# Altium PCB PCB_AltiumDesigner (3).PcbDoc
Units mm, origin at the board's own origin, x right, y up, seen from the top; angles counter-clockwise.
Board outline 152.4 x 101.6 mm, 2 copper layers (Top Layer, Bottom Layer); 15 components, 14 nets, 62 pads, 0 vias.
Unrouted connection lines stored in the file: 2.
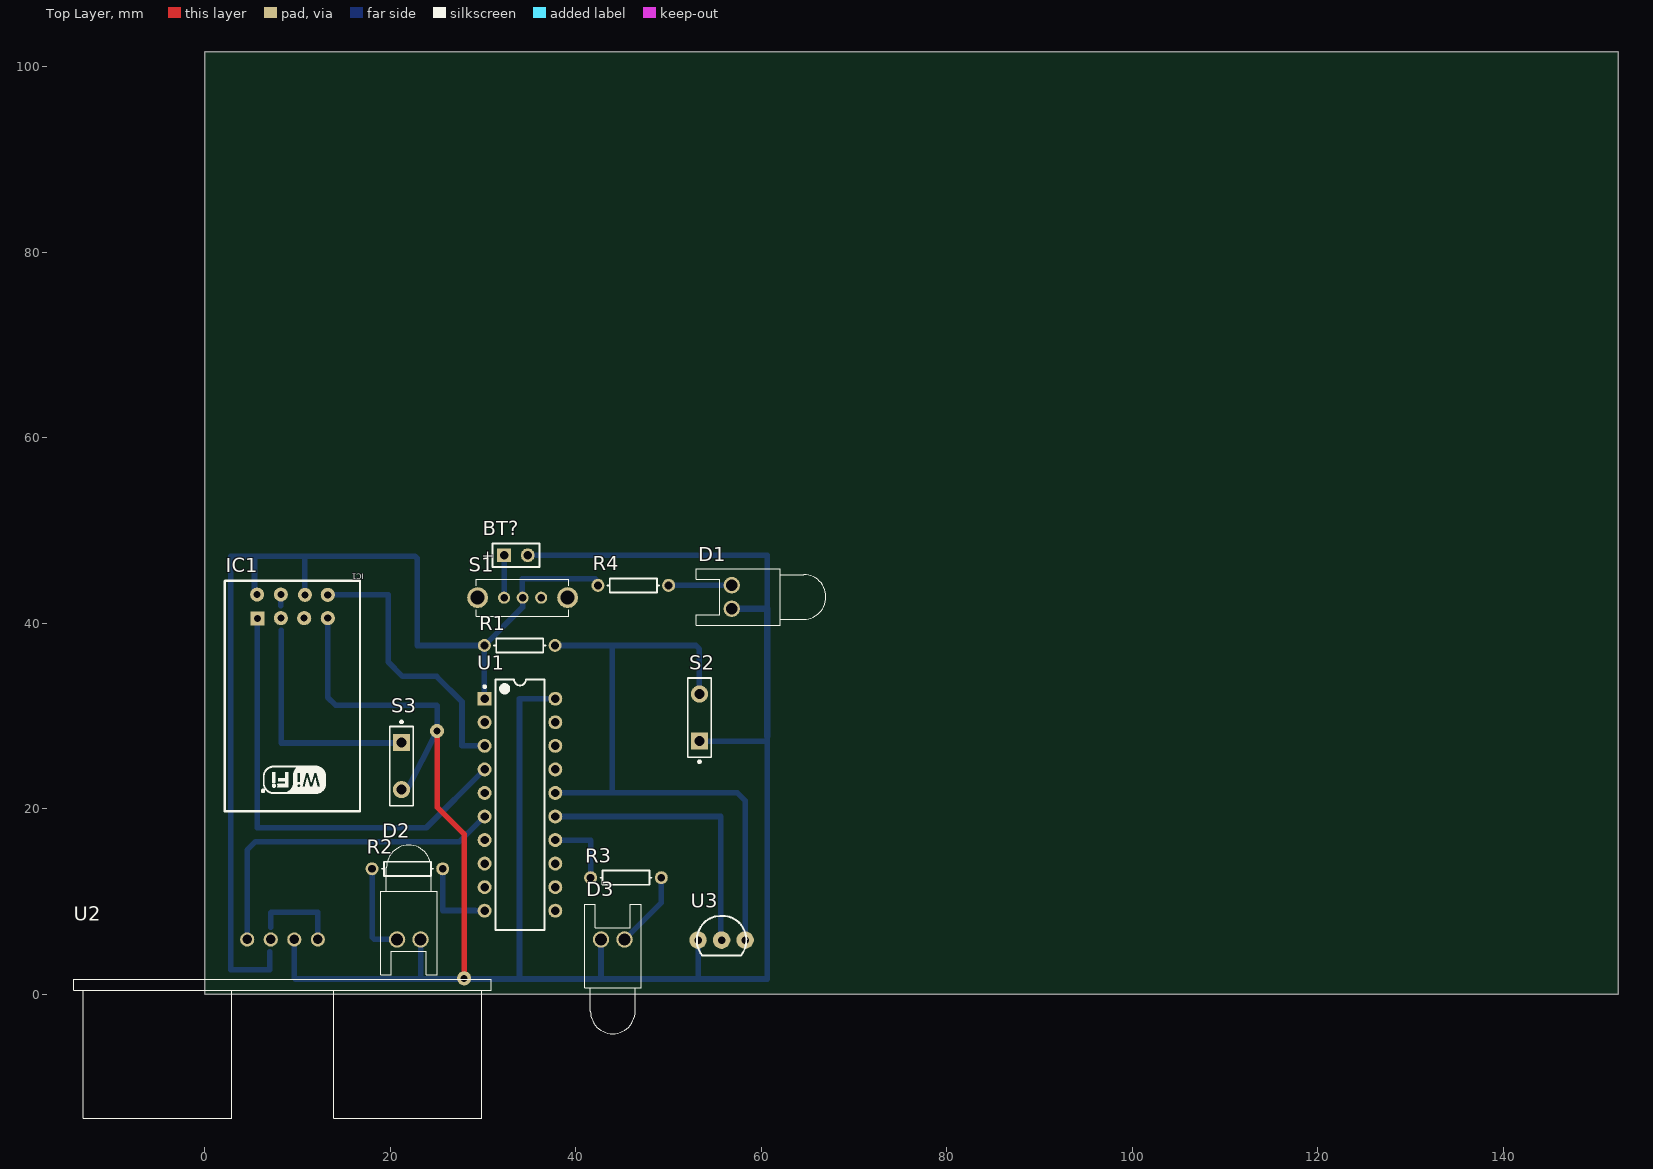
[diagram p0: Top Layer view]
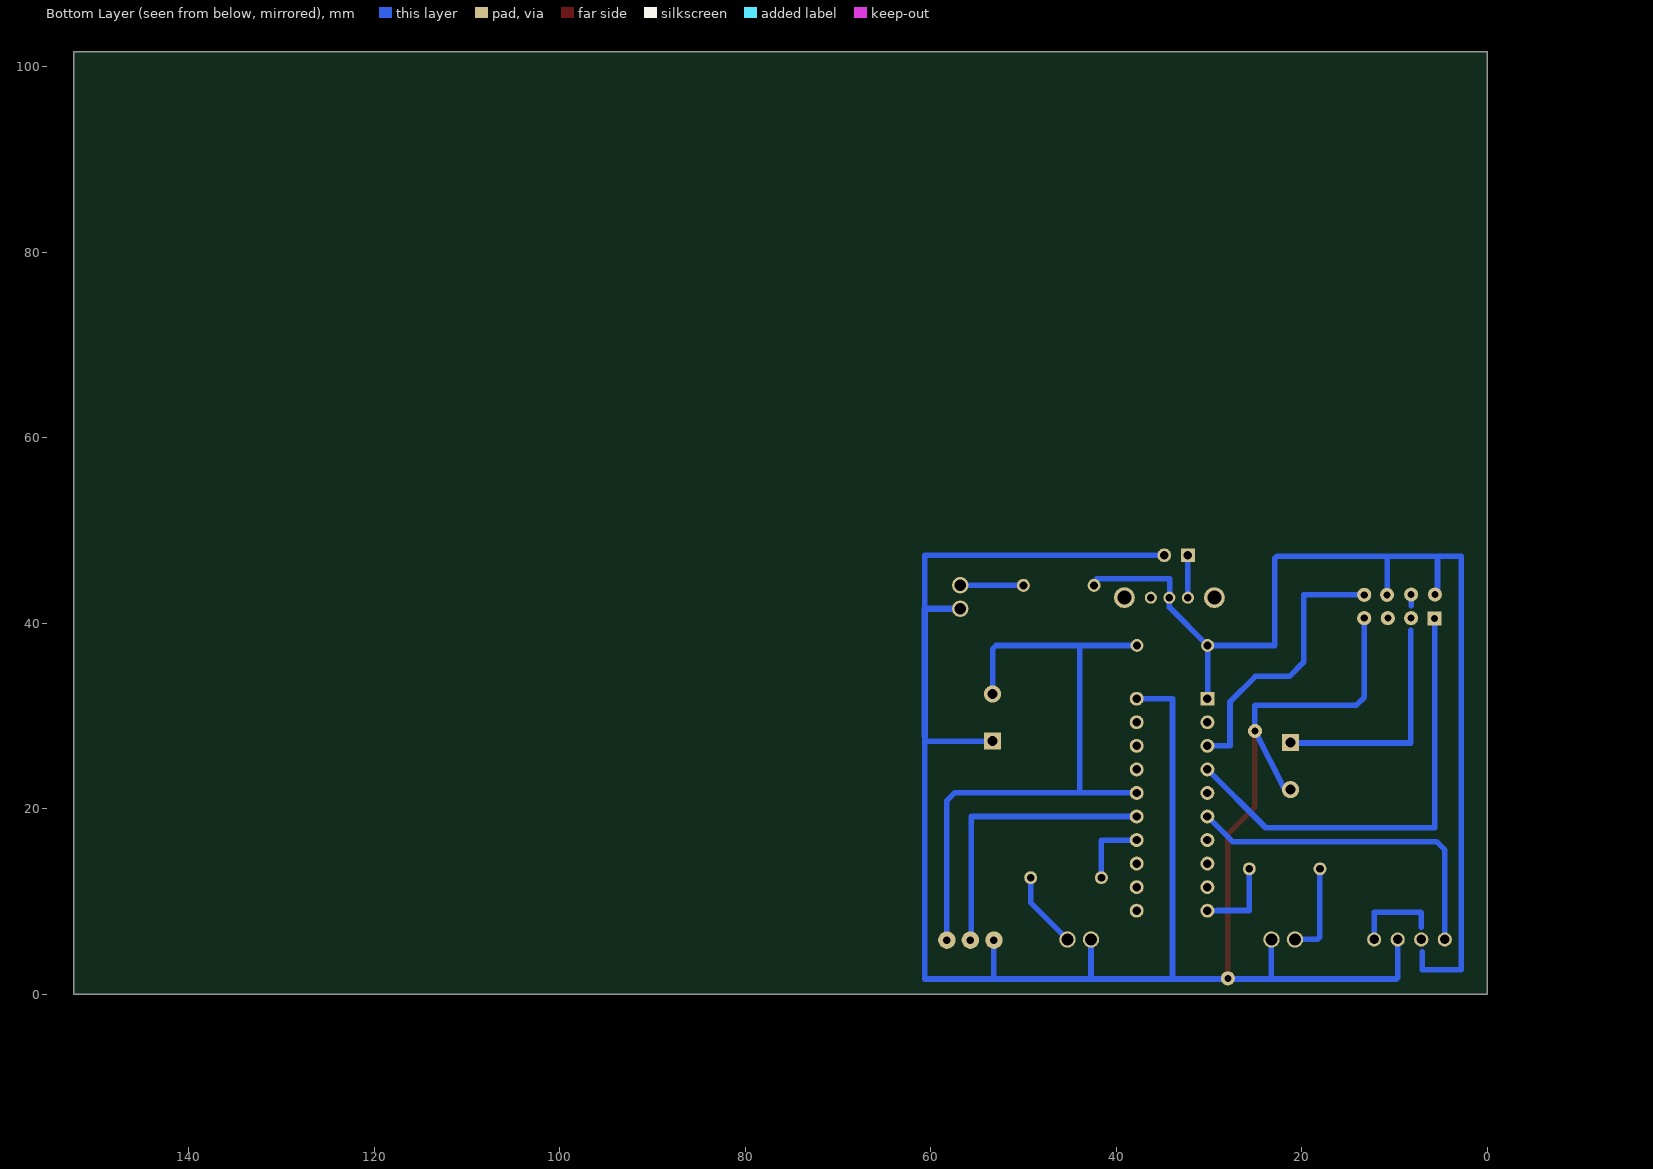
[diagram p1: Bottom Layer view, seen from below]

## Layer stack, top to bottom
Top Solder: solder mask 0.0102, Solder Resist, Dk 3.5
Top Layer: signal copper 0.0356
Dielectric 1: dielectric 0.32, FR-4, Dk 4.8
Bottom Layer: signal copper 0.0356
Bottom Solder: solder mask 0.0102, Solder Resist, Dk 3.5

## Board outline
0,0 152.4,0 152.4,101.6 0,101.6

## Design rules (kind name [scope] priority, off if disabled: settings)
AssemblyTestPointUsage [All] p0: scope1count=1 scope1_0_kind=Board scope1_0_value=Board scope2count=1 scope2_0_kind=Board scope2_0_value=Board commentlength=0
AssemblyTestpoint [All] p0: scope1count=1 scope1_0_kind=Board scope1_0_value=Board scope2count=1 scope2_0_kind=Board scope2_0_value=Board commentlength=0
Clearance [All] p0: scope1count=1 scope1_0_kind=Board scope1_0_value=Board scope2count=1 scope2_0_kind=Board scope2_0_value=Board commentlength=0 gap=0.254
Clearance [All] p1: gap=0.254 ignorepadtopadclearanceinfootprint=FALSE except(0: Arc-Hole Track-Hole SMDPad-Hole THPad-Hole Via-Hole Fill-Hole Poly-Hole Region-Hole Text-Hole)
ComponentClearance [All] p0: scope1count=1 scope1_0_kind=Board scope1_0_value=Board scope2count=1 scope2_0_kind=Board scope2_0_value=Board commentlength=0 gap=0.254 collisioncheckmode=3
DiffPairsRouting [All] p0: scope1count=1 scope1_0_kind=Board scope1_0_value=Board scope2count=1 scope2_0_kind=Board scope2_0_value=Board commentlength=0
FabricationTestPointUsage [All] p0: scope1count=1 scope1_0_kind=Board scope1_0_value=Board scope2count=1 scope2_0_kind=Board scope2_0_value=Board commentlength=0 valid=0 allowmultiple=FALSE
FabricationTestpoint [All] p0: scope1count=1 scope1_0_kind=Board scope1_0_value=Board scope2count=1 scope2_0_kind=Board scope2_0_value=Board commentlength=0 side=3 testpointundercomponent=TRUE minsize=1.016 maxsize=2.54 preferedsize=1.524 minholesize=0 maxholesize=1.016 preferedholesize=0.813 testpointgrid=0.025
FanoutControl Fanout_Default [All] p0: scope1count=1 scope1_0_kind=Board scope1_0_value=Board scope2count=1 scope2_0_kind=Board scope2_0_value=Board commentlength=30 // Fanout_Default (Default Rule)
FanoutControl Fanout_Small [All] p0 off: scope1count=1 scope1_0_kind=Board scope1_0_value=Board scope2count=1 scope2_0_kind=Board scope2_0_value=Board commentlength=84 // Protel DXP Scope 1 Expression Was: (CompPinCount < 5)   Fanout_Small (Default Rule)
FanoutControl Fanout_SOIC [All] p0 off: scope1count=1 scope1_0_kind=Board scope1_0_value=Board scope2count=1 scope2_0_kind=Board scope2_0_value=Board commentlength=71 // Protel DXP Scope 1 Expression Was: IsSOIC   Fanout_SOIC (Default Rule)
FanoutControl Fanout_LCC [All] p0 off: scope1count=1 scope1_0_kind=Board scope1_0_value=Board scope2count=1 scope2_0_kind=Board scope2_0_value=Board commentlength=69 // Protel DXP Scope 1 Expression Was: IsLCC   Fanout_LCC (Default Rule)
FanoutControl Fanout_BGA [All] p0 off: scope1count=1 scope1_0_kind=Board scope1_0_value=Board scope2count=1 scope2_0_kind=Board scope2_0_value=Board commentlength=69 // Protel DXP Scope 1 Expression Was: IsBGA   Fanout_BGA (Default Rule)
Height [All] p0: scope1count=1 scope1_0_kind=Board scope1_0_value=Board scope2count=1 scope2_0_kind=Board scope2_0_value=Board commentlength=0
HoleSize [All] p0: scope1count=1 scope1_0_kind=Board scope1_0_value=Board scope2count=1 scope2_0_kind=Board scope2_0_value=Board commentlength=0 absolutevalues=TRUE maxlimit=2.54 minlimit=0.025 maxpercent=80.000 minpercent=20.000
HoleToHoleClearance [All] p0: scope1count=1 scope1_0_kind=Board scope1_0_value=Board scope2count=1 scope2_0_kind=Board scope2_0_value=Board commentlength=0
LayerPairs [All] p0: scope1count=1 scope1_0_kind=Board scope1_0_value=Board scope2count=1 scope2_0_kind=Board scope2_0_value=Board commentlength=0 enforce=TRUE
MinimumSolderMaskSliver [All] p0: scope1count=1 scope1_0_kind=Board scope1_0_value=Board scope2count=1 scope2_0_kind=Board scope2_0_value=Board commentlength=0
NetAntennae [All] p0: scope1count=1 scope1_0_kind=Board scope1_0_value=Board scope2count=1 scope2_0_kind=Board scope2_0_value=Board commentlength=0
PasteMaskExpansion [All] p0: scope1count=1 scope1_0_kind=Board scope1_0_value=Board scope2count=1 scope2_0_kind=Board scope2_0_value=Board commentlength=0 expansion=0
PlaneClearance [All] p0: scope1count=1 scope1_0_kind=Board scope1_0_value=Board scope2count=1 scope2_0_kind=Board scope2_0_value=Board commentlength=0 clearance=0.508
PlaneConnect [All] p0: scope1count=1 scope1_0_kind=Board scope1_0_value=Board scope2count=1 scope2_0_kind=Board scope2_0_value=Board commentlength=0 planeconnectstyle=Relief reliefexpansion=0.508 reliefentries=4 reliefconductorwidth=0.254 reliefairgap=0.254
PolygonConnect [All] p0: scope1count=1 scope1_0_kind=Board scope1_0_value=Board scope2count=1 scope2_0_kind=Board scope2_0_value=Board commentlength=0 connectstyle=Relief reliefconductorwidth=0.254 reliefentries=4 polygonreliefangle="90 Angle"
PolygonConnect [All] p1: connectstyle=Relief reliefconductorwidth=0.254 reliefentries=4 polygonreliefangle="90 Angle" airgapwidth=0.254
RoomDefinition Sheet1 [All] p0: scope1count=1 scope1_0_kind=ComponentClass scope1_0_value=Sheet1 scope2count=1 scope2_0_kind=Board scope2_0_value=Board commentlength=0 region_x1=10000000 region_y1=10000000 region_x2=36000000 region_y2=29400000 confinementstyle=ConfineIn
RoomDefinition Sheet1 [InComponentClass('Sheet1')] p1: confinementstyle=ConfineIn formatcopy=TRUE lockcomponents=FALSE outline 0,0 66.04,0 66.04,49.276 0,49.276
RoutingCorners [All] p0: scope1count=1 scope1_0_kind=Board scope1_0_value=Board scope2count=1 scope2_0_kind=Board scope2_0_value=Board commentlength=0 cornerstyle=45-Degree minsetback=2.54 maxsetback=2.54
RoutingLayers [All] p0: scope1count=1 scope1_0_kind=Board scope1_0_value=Board scope2count=1 scope2_0_kind=Board scope2_0_value=Board commentlength=0 top layer=Automatic bottom layer=Automatic
RoutingPriority [All] p0: scope1count=1 scope1_0_kind=Board scope1_0_value=Board scope2count=1 scope2_0_kind=Board scope2_0_value=Board commentlength=0
RoutingTopology [All] p0: scope1count=1 scope1_0_kind=Board scope1_0_value=Board scope2count=1 scope2_0_kind=Board scope2_0_value=Board commentlength=0 topology=Shortest
RoutingVias [All] p0: scope1count=1 scope1_0_kind=Board scope1_0_value=Board scope2count=1 scope2_0_kind=Board scope2_0_value=Board commentlength=0 holewidth=0.711 width=1.27 viastyle="Through Hole" minholewidth=0.711 minwidth=1.27 maxholewidth=0.711 maxwidth=1.27
RoutingVias [All] p1: holewidth=0.711 width=1.27 viastyle="Through Hole" minholewidth=0.711 minwidth=1.27 maxholewidth=0.711 maxwidth=1.27
ShortCircuit [All] p0: scope1count=1 scope1_0_kind=Board scope1_0_value=Board scope2count=1 scope2_0_kind=Board scope2_0_value=Board commentlength=0 allowed=FALSE
SilkToBoardRegionClearance [All] p0: scope1count=1 scope1_0_kind=Board scope1_0_value=Board scope2count=1 scope2_0_kind=Board scope2_0_value=Board commentlength=0
SilkToSilkClearance [All] p0: scope1count=1 scope1_0_kind=Board scope1_0_value=Board scope2count=1 scope2_0_kind=Board scope2_0_value=Board commentlength=0
SilkToSolderMaskClearance [All] p0 off: scope1count=1 scope1_0_kind=Board scope1_0_value=Board scope2count=1 scope2_0_kind=Board scope2_0_value=Board commentlength=44 // Protel DXP Scope 1 Expression Was: IsPad
SolderMaskExpansion [All] p0: scope1count=1 scope1_0_kind=Board scope1_0_value=Board scope2count=1 scope2_0_kind=Board scope2_0_value=Board commentlength=0 expansion=0.102
SolderMaskExpansion [All] p1: expansion=0.102 istentingtop=FALSE
UnRoutedNet [All] p0: scope1count=1 scope1_0_kind=Board scope1_0_value=Board scope2count=1 scope2_0_kind=Board scope2_0_value=Board commentlength=0
UnpouredPolygon [All] p0: scope1count=1 scope1_0_kind=Board scope1_0_value=Board scope2count=1 scope2_0_kind=Board scope2_0_value=Board commentlength=0
Width [All] p0: scope1count=1 scope1_0_kind=Board scope1_0_value=Board scope2count=1 scope2_0_kind=Board scope2_0_value=Board commentlength=0 maxlimit=6 minlimit=0.254 preferedwidth=0.7
Width [All] p1: maxlimit=6 minlimit=0.254 preferedwidth=0.7 toplayer_prefwidth=0.6 bottomlayer_minwidth=0.6 bottomlayer_maxwidth=0.7 minimp=50.000000 maximp=50.000000 favimp=50.000000
30 further rules are at their usual default settings.

## Classes and differential pairs
component class Sheet1: BT? D1 D2 D3 IC1 R1 R2 R3 R4 S2 S3 U1 U2 U3

## Components (designator, comment, footprint, x,y, rotation, side; value= is the part's Value field where it differs from the comment)
BT? "Battery" BAT-2 33.553,47.32 r0 top
D1 "LED0" LED-0 56.82,42.824 r90 top
D2 "LED0" LED-0 21.996,5.893 r180 top
D3 "LED0" LED-0 43.993,5.893 r0 top
IC1 "ESP8266 ESP-11" "ESP8266 ESP-01" 16.739,44.602 r180 top
R1 "Res1" AXIAL-0.3 33.96,37.592 r180 top
R2 "Res1" AXIAL-0.3 21.844,13.513 r0 top
R3 "Res1" AXIAL-0.3 45.415,12.548 r180 top
R4 "Res1" AXIAL-0.3 46.203,44.069 r0 top
S1 "EG1213" SW_EG1213 34.271,42.748 r0 top
S2 "SW-PB" SPST-2 53.34,29.82 r90 top
S3 "SW-PB" SPST-2 21.209,24.587 r270 top
U1 "MSP430G2533IN20" TI-N20 33.985,20.422 r0 top
U2 "LDR" XCVR_HC-SR04 8.382,5.893 r0 top
U3 "DS18B20" TO-92-AMMO 55.728,5.817 r0 top

## Footprints (in the part's own frame and the unit in brackets; to place one, negate y for a bottom-side part, rotate by r counter-clockwise, add the part's x,y. Pads: shape width x height; smd on the part's side, far side on the other; paste and mask are expansions set on the pad)
AXIAL-0.3 [mm] "Axial Device, Thru-Hole; 2 Leads; 0.3 in Pin Spacing"
  round 1.4 hole 0.85: 1(-3.81,0) 2(3.81,0)
  silkscreen extent -2.77,-0.76 2.77,0.76
BAT-2 [mm] "Battery; 2 Leads"
  rect 1.5x1.5 hole 0.9: 1(-1.27,0)
  round 1.5 hole 0.9: 2(1.27,0)
  silkscreen extent -2.54,-1.27 2.54,1.27
"ESP8266 ESP-01" [mil] "ESP8266 ESP-01"
  rect 60x60 hole 30: 1(436,161)
  round 60 hole 30: 2(437,60) 3(336,160) 4(336,60) 5(237,160) 6(234,61) 7(137,160) 8(137,61)
  silkscreen extent 0,1 575,980
LED-0 [mil] "LED; 2 Leads"
  round 70 hole 50: 1(50,0) 2(-50,0)
  silkscreen extent -120,-400 120,150
SPST-2 [mm] "Switch; 2 Leads"
  rect 1.85x1.85 hole 1.1: 1(-2.54,0)
  round 1.85 hole 1.1: 2(2.54,0)
  silkscreen extent -4.89,-1.27 4.28,1.27
SW_EG1213 [mm]
  round 1.308 hole 0.8: 1(-2,0) 2(0,0) 3(2,0)
  round 2.25 hole 1.5: P$4(-4.85,0) P$5(4.85,0)
  silkscreen extent -5,-2 5,2
TI-N20 [mm] "DIP, 20-Leads, Body 25.4x6.35 mm, Pitch 2.54 mm"
  rect 1.5x1.5 hole 0.9: 1(-3.81,11.43)
  round 1.5 hole 0.9: 2(-3.81,8.89) 3(-3.81,6.35) 4(-3.81,3.81) 5(-3.81,1.27) 6(-3.81,-1.27) 7(-3.81,-3.81) 8(-3.81,-6.35) 9(-3.81,-8.89) 10(-3.81,-11.43) 11(3.81,-11.43) 12(3.81,-8.89) 13(3.81,-6.35) 14(3.81,-3.81) 15(3.81,-1.27) 16(3.81,1.27) 17(3.81,3.81) 18(3.81,6.35) 19(3.81,8.89) 20(3.81,11.43)
  silkscreen extent -3.93,-13.5 2.65,13.5
TO-92-AMMO [mil]
  round 74 hole 32: 1(-100,0) 2(0,0) 3(100,0)
  silkscreen extent -105,-65 105,103
XCVR_HC-SR04 [mm]
  round 1.53 hole 1.02: 1(-3.81,0) 2(-1.27,0) 3(1.27,0) 4(3.81,0)
  silkscreen extent -22.5,-19.27 22.5,-4.27

## Part data
BT?: "Multicell Battery"
D1 D2 D3: "Typical INFRARED GaAs LED"
R1 R2 R3 R4: "Resistor"
S1: "EG Series SPDT On-On Right Angle Through Hole Slide Switch"
S2 S3: "Switch"
U1: "16 MHz Mixed Signal Microcontroller with 16 KB Flash, 512 B SRAM and 24 GPIOs, -40 to 85 degC, 20-pin DIP (N), Pb-Free (RoHS)"
U2: library part HC-SR04
U3: "Temp Sensor Digital Serial _1-Wire_ 3-Pin TO-92 T/R"

## Free pads (board coordinates)
  round 1.524 hole 0.762: 2(27.965,1.702) GND(25.044,28.372)

## Nets (pads, with @x,y where several pads share a name; then routed paths per layer and width w, separated by ;. In a path a pad name is that pad's centre, name@x,y a point inside that pad or via, vN(x,y) a via of type N, cw(c..) or ccw(c..) an arc to the next point about the centre after c; other vN are vias at no path point)
A: IC1.1 U1.4 | length 49.7
  Bottom Layer w0.6: IC1.1 5.664,17.932 23.876,17.932 U1.4
B: IC1.8 U1.3 | length 30.7
  Bottom Layer w0.6: IC1.8 19.761,43.053 19.761,35.839 21.336,34.265 24.994,34.265 27.737,31.521 27.737,26.772 U1.3
C: U1.6 U2.1 | length 36.7
  Bottom Layer w0.6: U2.1 4.572,15.519 5.486,16.434 27.457,16.434 U1.6
D: U1.15 U3.2 | length 31.2
  Bottom Layer w0.6: U1.15 55.626,19.152 55.626,5.918 U3.2
GND: BT?.2 D1.2 D2.2 D3.2 IC1.7 pad.2 pad.GND S2.1 S3.2 U1.20 U2.3 U3.1 | length 243.3
  Top Layer w0.6: pad.GND 25.044,20.168 27.965,17.247 pad.2
  Bottom Layer w0.6: U2.3 9.652,1.753 9.779,1.626 23.368,1.626 ; IC1.7 13.259,32.004 14.097,31.166 24.994,31.166 25.044,31.115 pad.GND 21.819,21.996 S3.2@21.692,21.996 ; D2.2 23.266,1.727 23.368,1.626 ; BT?.2 60.63,47.32 60.63,41.554 ; U1.20 33.934,31.852 33.934,1.727 33.833,1.626 ; D3.2 42.723,1.626 ; U3.1 53.188,1.626 ; S2.1 60.63,27.28 ; 60.63,27.788 60.63,27.28 ; 23.368,1.626 33.833,1.626 ; 33.833,1.626 42.723,1.626 ; 42.723,1.626 53.188,1.626 ; 53.188,1.626 60.63,1.626 60.63,27.28
  Bottom Layer w0.7: D1.2 60.63,41.554 60.63,27.788
NetBT?_1: BT?.1 S1.1 | length 4.6
  Top Layer w0.254: S1.1 S1.1@32.283,42.76
  Bottom Layer w0.6: S1.1 32.283,42.76 BT?.1
NetD1_1: D1.1 R4.2 | length 6.8
  Bottom Layer w0.6: R4.2 50.038,44.094 D1.1
NetD2_1: D2.1 R2.1 | length 10.2
  Bottom Layer w0.6: R2.1 18.034,6.147 18.288,5.893 D2.1
NetD3_1: D3.1 R3.1 | length 8.3
  Bottom Layer w0.6: D3.1 49.225,9.855 R3.1
NetIC1_6: IC1.4 S3.1 | length 26.8
  Bottom Layer w0.6: 8.204,41.88 IC1.4 ; 8.23,39.222 8.23,27.076 S3.1@21.692,27.076
NetR1_1: R1.1 S2.2 U1.16 U3.3 | length 72.5
  Top Layer w0.254: U1.16 U1.16@37.846,21.742
  Bottom Layer w0.6: R1.1 43.917,37.592 ; U1.16 43.713,21.692 ; S2.2 53.34,37.211 52.959,37.592 43.917,37.592 ; U3.3 58.268,20.853 57.429,21.692 43.713,21.692 ; 43.713,21.692 43.917,21.895 43.917,37.592
NetR2_2: R2.2 U1.10 | length 9
  Bottom Layer w0.6: R2.2 25.654,9.017 29.134,9.017 29.159,8.992 U1.10
NetR3_2: R3.2 U1.14 | length 7.8
  Bottom Layer w0.6: U1.14 41.554,16.612 41.605,16.561 R3.2
V: IC1.2 IC1.6 R1.2 R4.1 S1.2 U1.1 U2.4 | length 129
  Top Layer w0.254: U1.1@30.15,31.877 U1.1
  Bottom Layer w0.6: IC1.2 5.359,43.358 5.359,47.219 ; 7.01,4.548 7.01,2.642 2.819,2.642 2.819,47.219 5.359,47.219 ; 7.112,7.212 7.112,8.763 7.163,8.814 12.192,8.814 U2.4 ; IC1.6 10.795,47.092 10.668,47.219 ; U1.1 30.15,31.877 R1.2 ; R4.1 42.393,44.475 42.088,44.78 34.211,44.78 34.211,42.808 S1.2 34.271,41.713 R1.2 ; 5.359,47.219 10.668,47.219 ; 10.668,47.219 22.657,47.219 22.885,46.99 22.885,37.592 R1.2
pads on no net: IC1.3 IC1.5 S1.3 S1.P$4 S1.P$5 U1.2 U1.5 U1.7 U1.8 U1.9 U1.11 U1.12 U1.13 U1.17 U1.18 U1.19 U2.2

## Text inside footprints (layer, text, board x,y; h text height)
BT?: Top Overlay "+" at 29.883,46.743 h1.15
IC1: Mechanical 13 "CUTOUT POLYGON" at 16.484,20.762 h0.25 r180; Mechanical 1 "ANTENNA AREA" at 16.484,20.254 h0.25 r180